# EAGLE board PDB-SL-OSD (EAGLE 6.3)
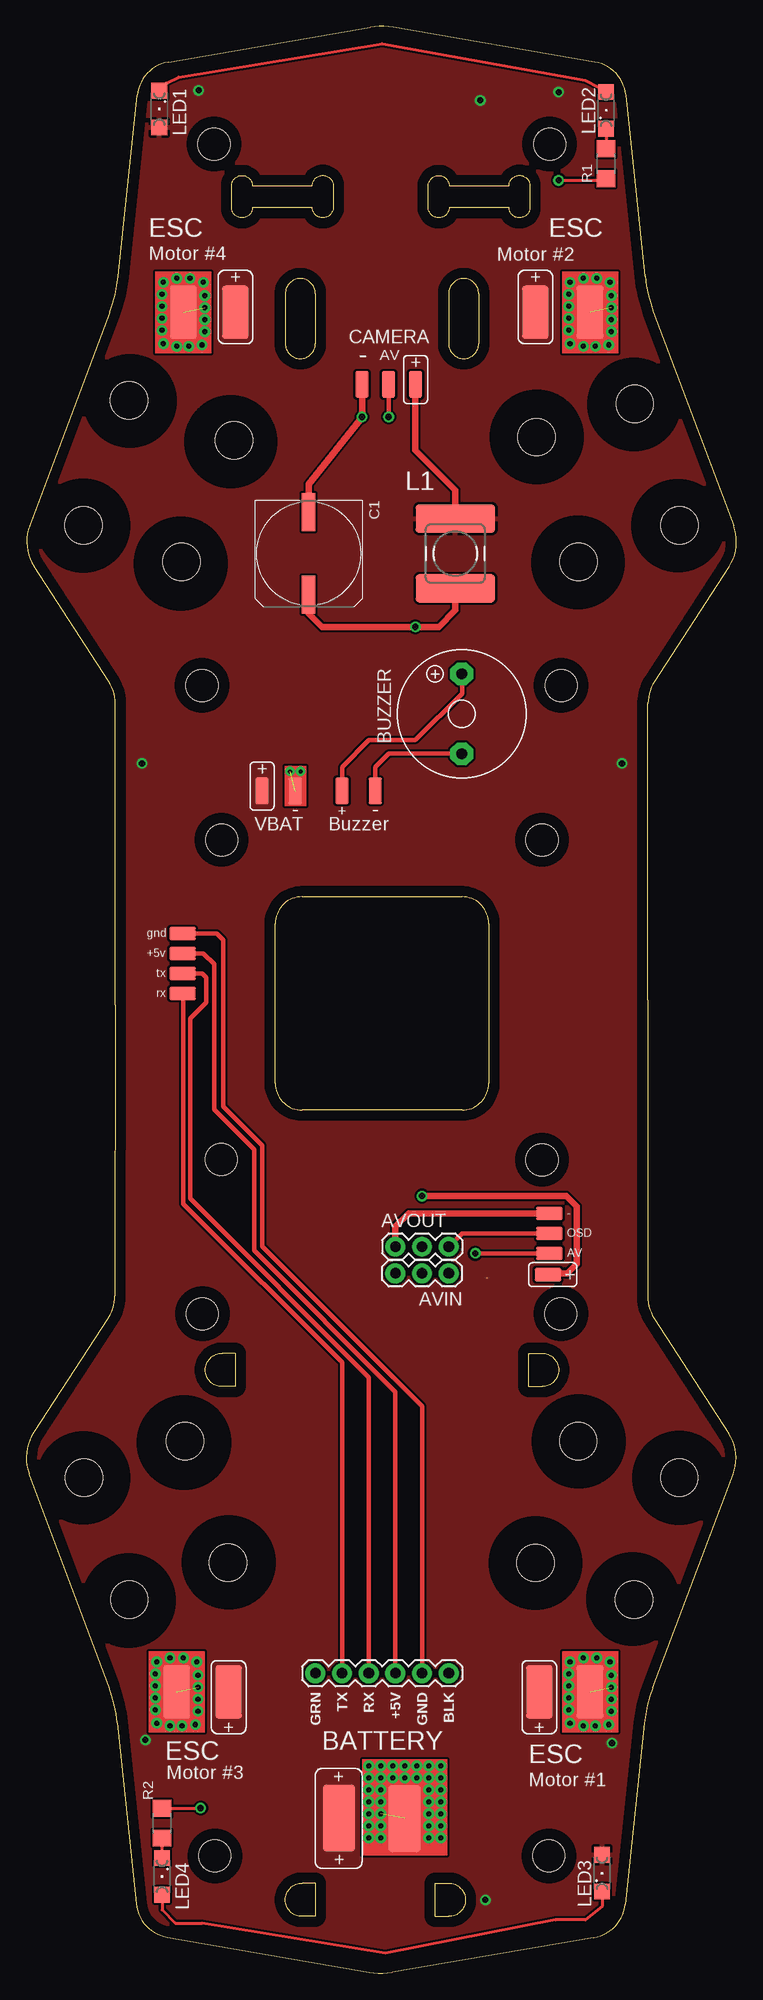
[diagram p0: board, top side]
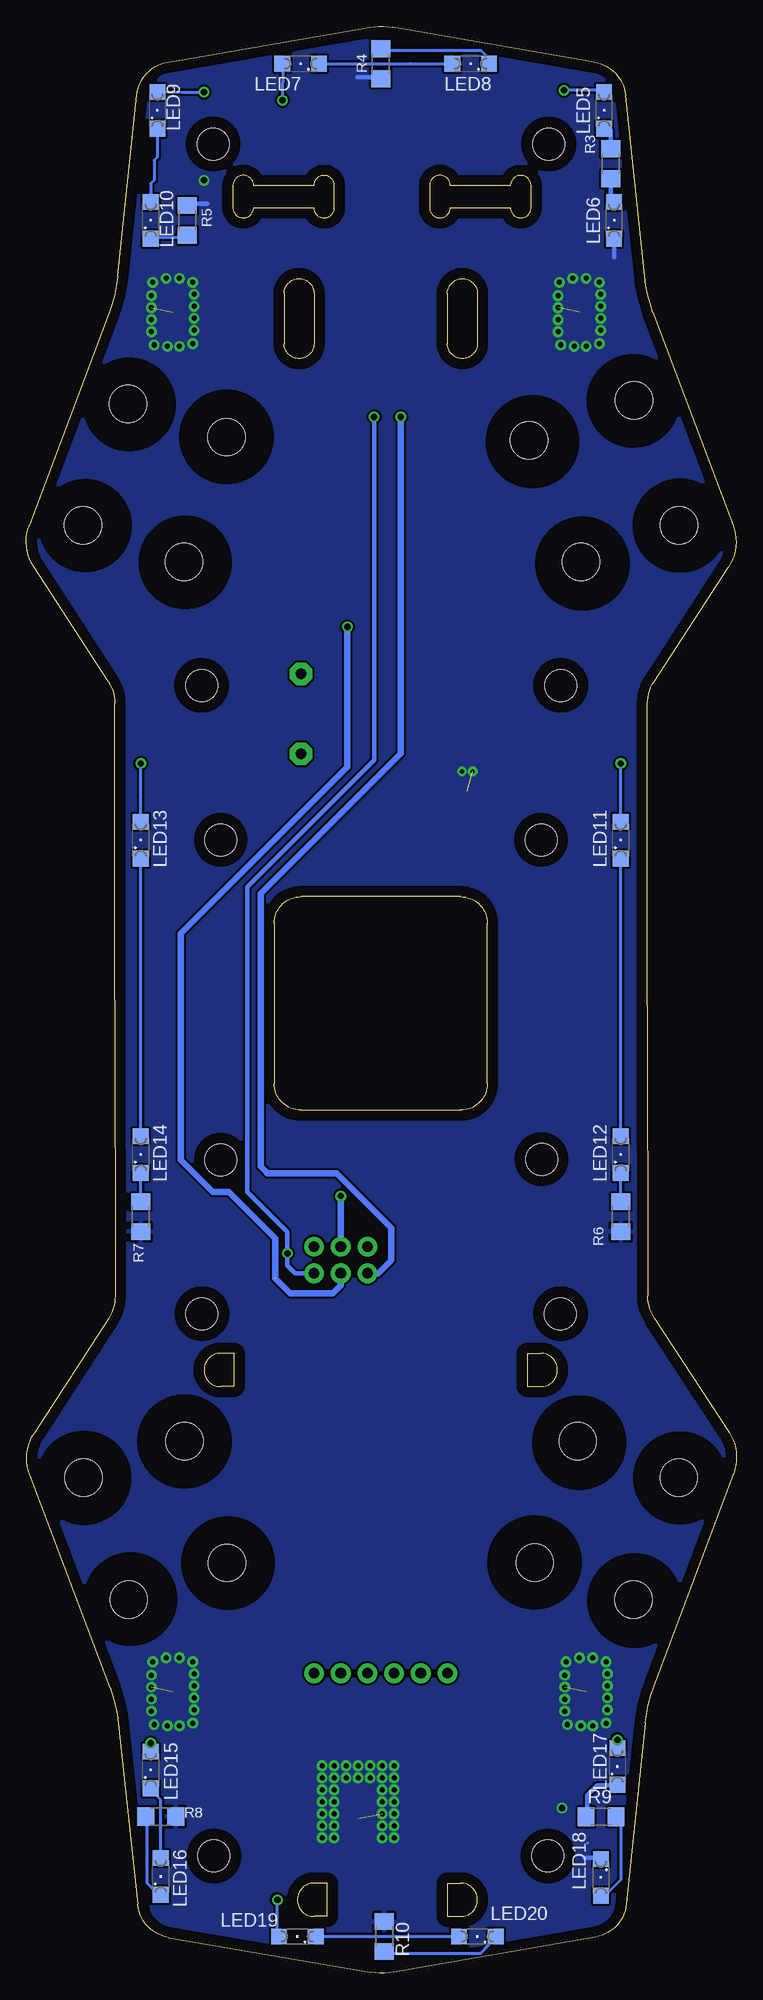
[diagram p1: board, bottom side, seen from below]

Size 67.65 x 185.5 mm. Coordinates in mm from the lower left corner, seen from the top.
Outline: 59.84,123.09 arc33 59.22,120.98 59.22,92.74 59.19,64.5 arc33 59.81,62.39 66.9,51.44 arc-54 67.33,47.52 59.67,27.2 arc15 58.87,23.8 57.04,6.55 arc-74 54.07,3.39 34.84,0.09 arc-20 32.66,0.09 13.43,3.44 arc-74 10.48,6.6 8.68,23.86 arc15 7.88,27.25 0.28,47.6 arc-54 0.71,51.51 7.82,62.45 arc33 8.45,64.55 8.48,92.27 8.48,92.77 8.48,120.98 arc33 7.85,123.09 0.75,134.03 arc-54 0.32,137.94 7.95,158.28 arc15 8.76,161.67 10.57,178.92 arc-74 13.53,182.09 32.76,185.41 arc-20 34.94,185.41 54.17,182.09 arc-74 57.13,178.92 58.94,161.67 arc15 59.74,158.28 67.37,137.94 arc-54 66.95,134.03 59.84,123.09
Outline: 26.27,102.56 41.51,102.56 arc-90 44.05,100.02 44.05,84.78 arc-90 41.51,82.24 26.27,82.24 arc-90 23.73,84.78 23.73,100.02 arc-90 26.27,102.56
Outline: 40.24,160.03 40.24,155.27 arc180 43.09,155.27 43.09,160.03 arc180 40.24,160.03
Outline: 24.68,160.03 24.68,155.27 arc180 27.54,155.27 27.54,160.03 arc180 24.68,160.03
Outline: 40.27,170.29 45.99,170.29 arc-182 47.97,170.29 47.97,168.23 arc-180 45.99,168.23 40.27,168.23 arc-180 38.29,168.23 38.29,170.29 arc-180 40.27,170.29
Outline: 21.54,170.29 27.26,170.29 arc-182 29.24,170.29 29.24,168.23 arc-180 27.26,168.23 21.54,168.23 arc-180 19.56,168.23 19.56,170.29 arc-180 21.54,170.29
Outline: 38.97,5.41 38.97,8.58 40.24,8.58 arc-180 40.24,5.41 38.97,5.41
Outline: 27.54,8.58 27.54,5.41 26.27,5.41 arc-180 26.27,8.58 27.54,8.58
Outline: 19.92,59.07 19.92,55.89 18.65,55.89 arc-180 18.65,59.07 19.92,59.07
Outline: 47.86,55.89 47.86,59.07 49.13,59.07 arc-180 49.13,55.89 47.86,55.89
Copper layers (1*16): Top 0.035mm / dielectric 1.5mm / Bottom 0.035mm
Design rules "default": minimum track width 10mil, minimum drill 24mil, track to track 8mil, track to pad 8mil, pad to pad 8mil, via to via 8mil, smd to smd 8mil, copper to edge 40mil, drill to drill 8mil, minimum pad ring 10mil, minimum via ring 8mil, stop-mask expansion 4mil, vias tented up to drill 0mil, thermal gap 10mil
Holes 3.56 mm at 15.12,50.71 5.5,47.22 48.52,39.1 57.89,35.6 62.2,47.22 52.58,50.71 52.62,134.47 62.23,137.96 48.59,146.35 57.97,149.54 9.77,149.86 19.78,146.03 14.8,134.47 5.46,137.96 9.81,35.6 19.22,39.14
Holes 3.05 mm at 16.78,62.84 18.57,77.54 49.13,77.51 50.92,62.84 18.61,107.99 49.13,107.99 50.96,122.69 49.85,174.28 17.88,174.28 16.74,122.69 17.96,11.17 49.77,11.17
tRestrict: area 10.5,46.1 to 19.5,55; area 5.3,31 to 14.2,40; area 1,42.7 to 9.9,51.6; area 48.1,46.2 to 57.1,55.2; area 44,34.6 to 52.9,43.5; area 57.7,42.7 to 66.7,51.7; area 0.9,133.4 to 9.9,142.4; area 10.2,129.8 to 19.2,138.8; area 5.4,145.4 to 14.3,154.3; area 15,141.5 to 23.9,150.4; area 53.3,31.2 to 62.2,40.1; area 48.1,130 to 57,138.9; area 44.1,141.9 to 53.1,150.9; area 53.4,145 to 62.3,153.9; area 57.6,133.5 to 66.5,142.4; area 14.8,34.6 to 23.8,43.6; area 14.2,60.2 to 19.4,65.4; area 48.3,60.2 to 53.5,65.4; area 47.3,171.7 to 52.5,176.9; area 15.3,171.7 to 20.5,176.9; area 15.4,8.6 to 20.6,13.8; area 47.2,8.6 to 52.4,13.8; area 14.1,120.1 to 19.3,125.3; area 48.4,120.1 to 53.6,125.3
bRestrict: area 10.5,46.1 to 19.5,55; area 5.2,31 to 14.2,40; area 0.9,42.7 to 9.8,51.6; area 48.1,46.2 to 57.1,55.2; area 44,34.6 to 52.9,43.5; area 57.7,42.7 to 66.6,51.7; area 0.9,133.4 to 9.9,142.4; area 10.2,129.8 to 19.1,138.8; area 5.4,145.4 to 14.3,154.3; area 15,141.5 to 23.9,150.4; area 53.3,31.2 to 62.2,40.1; area 48.1,130 to 57,138.9; area 44.1,141.9 to 53.1,150.9; area 53.4,145 to 62.3,153.9; area 57.6,133.5 to 66.5,142.4; area 14.7,34.6 to 23.7,43.6; area 14.1,120.1 to 19.3,125.3; area 48.4,120.1 to 53.6,125.3; area 48.3,60.2 to 53.5,65.4; area 14.2,60.2 to 19.4,65.4; area 15.3,171.7 to 20.5,176.9; area 47.3,171.7 to 52.5,176.9; area 15.4,8.6 to 20.6,13.8; area 47.2,8.6 to 52.4,13.8

## Footprints (pad centres in the part's own frame; a part is rotated, then mirrored left to right if it is on the bottom)
1X03 = drill 1.016 pad 1.88: 1 0,0; 2 2.54,0; 3 5.08,0
F/TMB = drill 1.016 pad 2.159 octagon: + 3.81,0; - -3.81,0
UD-10X10_NICHICON = smd 3.6 x 1.3: + 3.925,0; - -3.95,0
1X06 = drill 1.016 pad 1.88: 1 0,0; 2 2.54,0; 3 5.08,0; 4 7.62,0; 5 10.16,0; 6 12.7,0
POWER-CHOKE_WE-TPC = smd 7.57 x 2.708: 1 0,3.32; 2 0,-3.32
SML1206 = smd 1.5 x 1.5: A 1.75,0; C -1.75,0
R1206 = smd 1.6 x 1.803: 1 -1.422,0; 2 1.422,0
OC_PAD0.2X0.1VCC = smd 2.54 x 5.08: P$1 0,-0.064
OC_PAD0.2X0.1XGND = smd 2.54 x 5.08: P$1 0.127,-0.191 | drill 0.483 pad 1.016: P$2 -1.778,2.667; P$3 -1.905,1.524; P$4 -1.905,0.381; P$5 -1.905,-0.762; P$6 -1.905,-1.905; P$7 -1.778,-3.175; P$8 -0.508,-3.429; P$9 0.635,-3.429; P$10 1.905,-3.302; P$11 2.032,2.667; P$12 2.159,1.397; P$13 2.159,0.254; P$14 2.159,-0.889; P$15 2.159,-2.032; P$16 -0.508,3.048; P$17 0.762,3.048
OC_PAD0.25X0.12GND = smd 3.048 x 6.35: P$1 0.254,-0.191 | drill 0.483 pad 1.016: P$2 -2.032,3.683; P$3 -0.889,3.683; P$4 0.254,3.683; P$5 -2.032,4.826; P$6 1.397,3.683; P$7 -0.889,4.826; P$8 0.254,4.826; P$9 1.397,4.826; P$10 2.54,4.826; P$11 2.54,3.683; P$12 -2.032,2.54; P$13 -2.032,1.397; P$14 -2.032,0.254; P$15 -2.032,-0.889; P$16 -2.032,-2.032; P$17 2.54,2.54; P$18 2.54,1.397; P$19 2.54,0.254; P$20 2.54,-0.889; P$21 2.54,-2.032; P$22 -3.175,3.683; P$23 -3.175,4.826; P$24 -3.175,2.54; P$25 -3.175,1.397; P$26 -3.175,0.254; P$27 -3.175,-0.889; P$28 -3.175,-2.032; P$29 3.683,4.826; P$30 3.683,3.683; P$31 3.683,2.54; P$32 3.683,1.397; P$33 3.683,0.254; P$34 3.683,-0.889; P$35 3.683,-2.032
OC_PAD0.25X0.12VCC = smd 3.048 x 6.35: P$1 0.349,-0.286
OC_PAD0.1X0.05VCC = smd 1.27 x 2.54: P$1 0,-0.064
OC_PAD0.1X0.5GND = smd 1.27 x 2.54: P$1 0,0.064 | drill 0.406 pad 0.762: P$2 0.508,1.905; P$16 -0.508,1.905
OC_PAD_AV = smd 1.27 x 2.54: P$1 0,-0.064

## Placement (x,y rotation side)
AVIN  [1X03]  40.24,66.69 180 top
AVOUT  [1X03]  35.16,69.23 0 top
BUZZER  5V  [F/TMB]  41.48,119.99 90 top
C1  470uF/25V  [UD-10X10_NICHICON]  26.9,135.27 270 top
JP5  [1X06]  27.54,28.59 0 top
L1  100uH  [POWER-CHOKE_WE-TPC]  40.87,135.27 0 top
LED1  WHITE  [SML1206]  12.68,177.62 270 top
LED2  WHITE  [SML1206]  55.23,177.49 90 top
LED3  RED  [SML1206]  54.84,9.54 90 top
LED4  RED  [SML1206]  12.93,9.22 270 top
LED5  WHITE  [SML1206]  12.61,177.49 90 bottom
LED6  WHITE  [SML1206]  11.66,167.02 90 bottom
LED7  WHITE  [SML1206]  41.51,181.94 180 bottom
LED8  WHITE  [SML1206]  25.31,181.94 180 bottom
LED9  WHITE  [SML1206]  55.16,177.49 90 bottom
LED10  WHITE  [SML1206]  55.79,167.02 90 bottom
LED11  RED  [SML1206]  11.03,107.96 90 bottom
LED12  RED  [SML1206]  11.03,78 90 bottom
LED13  RED  [SML1206]  56.74,107.96 90 bottom
LED14  RED  [SML1206]  56.74,78 90 bottom
LED15  RED  [SML1206]  55.79,19.38 90 bottom
LED16  RED  [SML1206]  54.84,9.22 90 bottom
LED17  RED  [SML1206]  11.34,19.7 90 bottom
LED18  RED  [SML1206]  12.91,9.14 270 bottom
LED19  RED  [SML1206]  41.82,3.5 180 bottom
LED20  RED  [SML1206]  24.68,3.5 180 bottom
R1  680  [R1206]  55.22,172.41 90 top
R2  680  [R1206]  12.93,14.3 270 top
R3  680  [R1206]  11.98,172.41 270 bottom
R4  680  [R1206]  33.89,181.94 90 bottom
R5  680  [R1206]  52.3,167.02 270 bottom
R6  680  [R1206]  11.03,72.08 90 bottom
R7  680  [R1206]  56.74,72.08 90 bottom
R8  680  [R1206]  54.84,14.93 180 bottom
R9  680  [R1206]  12.91,14.89 0 bottom
R10  680  [R1206]  33.57,3.5 270 bottom
U$1  OC_PAD_VCC  [OC_PAD0.2X0.1VCC]  19.28,26.74 180 top
U$2  OC_PAD_GND  [OC_PAD0.2X0.1XGND]  14.2,27 0 top
U$3  OC_PAD_VCC  [OC_PAD0.2X0.1VCC]  48.87,26.74 180 top
U$4  OC_PAD_GND  [OC_PAD0.2X0.1XGND]  53.57,27 0 top
U$5  OC_PAD_VCC  [OC_PAD0.2X0.1VCC]  48.49,158.31 0 top
U$6  OC_PAD_GND  [OC_PAD0.2X0.1XGND]  53.57,158.44 0 top
U$7  OC_PAD_VCC  [OC_PAD0.2X0.1VCC]  19.92,158.31 0 top
U$8  OC_PAD_GND  [OC_PAD0.2X0.1XGND]  14.84,158.44 0 top
U$9  OC_PAD_GND_BIG  [OC_PAD0.25X0.12GND]  35.79,14.93 0 top
U$10  OC_PAD_VCC_BIG  [OC_PAD0.25X0.12VCC]  29.44,15.06 0 top
U$11  OC_PAD_VCC_SMALL  [OC_PAD0.1X0.05VCC]  22.46,112.73 0 top
U$12  OC_PAD_GND_SMALL  [OC_PAD0.1X0.5GND]  25.63,112.6 0 top
U$13  OC_PAD_VCC_SMALL  [OC_PAD0.1X0.05VCC]  49.76,66.56 270 top
U$15  OC_PAD_VCC_SMALL  [OC_PAD0.1X0.05VCC]  37.08,151.46 0 top
U$16  OC_PAD_AV  [OC_PAD_AV]  31.98,151.46 0 top
U$18  OC_PAD_AV  [OC_PAD_AV]  34.5,151.46 0 top
U$19  OC_PAD_AV  [OC_PAD_AV]  33.25,112.72 0 top
U$20  OC_PAD_AV  [OC_PAD_AV]  30.08,112.72 0 top
U$22  OC_PAD_AV  [OC_PAD_AV]  14.84,99.07 90 top
U$23  OC_PAD_AV  [OC_PAD_AV]  14.84,97.17 90 top
U$24  OC_PAD_AV  [OC_PAD_AV]  14.84,95.26 90 top
U$25  OC_PAD_AV  [OC_PAD_AV]  14.84,93.36 90 top
U$26  OC_PAD_AV  [OC_PAD_AV]  49.76,70.5 90 top
U$27  OC_PAD_AV  [OC_PAD_AV]  49.76,68.59 90 top
U$28  OC_PAD_AV  [OC_PAD_AV]  49.76,72.4 90 top

## Library data of the parts
AVIN AVOUT = SparkFun-Passives
BUZZER = buzzer; OC_FARNELL: unknown; OC_NEWARK: unknown
C1 L1 = rcl
JP5 = SparkFun
LED1-LED20 = led
R1-R8 R10 = resistor
R9 = ref-packages
U$1-U$13 U$15 U$16 U$18-U$20 U$22-U$28 = oc

## Nets
GND: R2.1 R6.1 R7.1 R8.1 R10.1 U$2.P$1 U$2.P$2 U$2.P$3 U$2.P$4 U$2.P$5 U$2.P$6 U$2.P$7 U$2.P$8 U$2.P$9 U$2.P$10 U$2.P$11 U$2.P$12 U$2.P$13 U$2.P$14 U$2.P$15 U$2.P$16 U$2.P$17 U$4.P$1 U$4.P$2 U$4.P$3 U$4.P$4 U$4.P$5 U$4.P$6 U$4.P$7 U$4.P$8 U$4.P$9 U$4.P$10 U$4.P$11 U$4.P$12 U$4.P$13 U$4.P$14 U$4.P$15 U$4.P$16 U$4.P$17 U$6.P$1 U$6.P$2 U$6.P$3 U$6.P$4 U$6.P$5 U$6.P$6 U$6.P$7 U$6.P$8 U$6.P$9 U$6.P$10 U$6.P$11 U$6.P$12 U$6.P$13 U$6.P$14 U$6.P$15 U$6.P$16 U$6.P$17 U$8.P$1 U$8.P$2 U$8.P$3 U$8.P$4 U$8.P$5 U$8.P$6 U$8.P$7 U$8.P$8 U$8.P$9 U$8.P$10 U$8.P$11 U$8.P$12 U$8.P$13 U$8.P$14 U$8.P$15 U$8.P$16 U$8.P$17 U$9.P$1 U$9.P$2 U$9.P$3 U$9.P$4 U$9.P$5 U$9.P$6 U$9.P$7 U$9.P$8 U$9.P$9 U$9.P$10 U$9.P$11 U$9.P$12 U$9.P$13 U$9.P$14 U$9.P$15 U$9.P$16 U$9.P$17 U$9.P$18 U$9.P$19 U$9.P$20 U$9.P$21 U$9.P$22 U$9.P$23 U$9.P$24 U$9.P$25 U$9.P$26 U$9.P$27 U$9.P$28 U$9.P$29 U$9.P$30 U$9.P$31 U$9.P$32 U$9.P$33 U$9.P$34 U$9.P$35 U$12.P$1 U$12.P$2 U$12.P$16
N$9: R3.2
N$10: LED8.A
N$13: LED9.C LED10.A
N$16: LED1.C LED2.A
N$17: LED2.C R1.2
N$18: LED3.C
N$19: LED4.C R2.2
N$27: LED16.C R8.2
S$1: JP5.4
S$4: LED14.C
S$7: JP5.3
S$9: U$13.P$1
S$11: U$19.P$1
S$15: LED6.A
S$22: JP5.5
S$23: LED6.C
S$25: AVIN.1
S$26: AVIN.3
S$27: AVOUT.3
S$32: LED7.C
S$37: AVOUT.1
S$39: LED16.A
S$40: LED4.A
S$42: JP5.2
S$43: AVOUT.2
S$45: AVIN.2
VCC: L1.1 LED1.A LED3.A LED5.A LED7.A LED9.A LED11.A LED13.A LED15.A LED17.A LED19.A U$1.P$1 U$3.P$1 U$5.P$1 U$7.P$1 U$10.P$1 U$11.P$1

## Tracks (layer width: path | path; a pad name or v marks a point on that pad's centre or on a via)
GND  (via drill 0.6)  (6 unrouted)
  Top 0.305: R2.1 v16.61,15.74 | v50.71,170.83 55.16,170.83
  Bottom 0.305: 14.21,12.39 14.2,12.39 14.21,12.41
  Bottom 0.406: 52.3,168.6 50.4,168.6 | 33.89,180.67 36.11,180.67 | 11.66,165.11 11.66,163.52 | 12.97,10.93 13.03,10.99 14.45,10.99
  pour Bottom: -2.94,188.29 70.72,188.29 70.72,187.02 69.45,187.02 69.45,-1.58 -2.94,-1.58
N$9
  Bottom 0.305: R3.2 11.98,170.51
N$10
  Bottom 0.305: 31.03,181.94 LED8.A
N$11  (via drill 0.61)
  Top 0.406: 34.52,151.46 v34.52,148.28
N$13
  Bottom 0.305: LED9.C 55.16,173.05 55.48,172.73 55.48,170.83 55.79,170.51 LED10.A
N$16
  Top 0.305: LED1.C 13.31,180.1 14.52,180.67 33.89,183.84 53.25,180.35 54.52,179.72 LED2.A
N$17
  Top 0.305: LED2.C R1.2
N$18
  Top 0.305: LED3.C 54.84,6.36 53.25,5.09 50.4,5.09 34.2,1.92 16.74,4.77 14.2,4.77 12.93,6.04 12.93,7
N$19
  Top 0.305: LED4.C R2.2
N$27
  Bottom 0.305: LED16.C 55.7,8.17 56.11,8.58 56.11,14.61 R8.2
S$1
  Top 0.406: JP5.4 35.16,55.38 21.69,68.84 21.69,78.5 17.88,82.31 17.88,96.15 16.87,97.17 14.84,97.17
S$2
  Bottom 0.305: 11.03,73.35 11.03,76.53
S$3
  Bottom 0.305: 11.03,79.7 11.03,106.69
S$4
  Bottom 0.305: LED14.C 56.63,76.85
S$5
  Bottom 0.305: 56.75,79.63 56.75,106.69
S$6
  Bottom 0.305: 56.75,73.67 56.75,76.23
S$7
  Top 0.406: 14.84,95.26 16.74,95.26 17.12,94.88 17.12,92.47 15.6,90.94 15.6,87.13 15.6,87.01 15.6,73.8 32.62,56.78 JP5.3
S$8
  Bottom 0.305: 55.48,165.43 52.3,165.43
  Bottom 0.406: 55.79,165.11 55.48,165.43
S$10
  Top 0.61: 37.06,151.46 37.06,145.11 40.87,141.3 40.87,138.44 40.55,138.76
S$11
  Top 0.406: U$19.P$1 33.25,113.04
S$12  (via drill 0.61)
  Top 0.61: 31.98,151.46 v31.98,148.28 26.9,141.87 26.9,139.08
S$15
  Bottom 0.305: LED6.A 11.98,168.38 11.98,168.92 11.98,169.24
  Bottom 0.406: 11.98,171.14 11.98,168.92
S$19
  Top 0.406: 30.08,112.41 30.08,114.95 32.62,117.49 37.06,117.49 41.51,121.93 41.51,123.84
S$22
  Top 0.406: JP5.5 37.7,53.99 22.46,69.23 22.46,78.88 18.77,82.56 18.77,98.44 18.14,99.07 14.84,99.07
S$23
  Bottom 0.305: LED6.C 11.44,165.75 11.03,165.75
S$24
  Top 0.406: 41.51,116.22 34.52,116.22 33.25,114.95 33.25,112.41
S$25  (via drill 0.6)
  Top 0.406: v42.78,68.59 49.76,68.59
  Bottom 0.406: 34.52,147.97 34.52,115.58 46.59,103.52 46.59,74.43 42.78,70.62 v42.78,68.59 42.78,67.45 42.01,66.69 AVIN.1
S$26
  Bottom 0.61: AVIN.3 34.14,66.69 33,67.83
S$27
  Top 0.406: 49.76,70.5 41.51,70.5 AVOUT.3
S$28
  Bottom 0.406: 12.61,175.59 11.98,175.59 11.98,173.68
S$30
  Bottom 0.406: 11.31,17.95 11.37,17.89 13.29,17.89 14.23,16.95 14.23,14.91
S$31
  Bottom 0.305: 34.2,183.21 24.36,183.21 23.41,182.26
S$32
  Bottom 0.305: LED7.C 31.03,181.94
S$33
  Bottom 0.61: 31.98,147.97 31.98,116.22 45.32,102.88 45.32,76.97
S$35
  Bottom 0.305: 11.03,14.62 11.03,8.9 12.61,7.31
S$36
  Bottom 0.305: 22.77,3.5 23.73,2.55 24.04,2.23 24.36,1.92 33.57,1.92
S$37
  Top 0.61: 49.76,72.4 36.43,72.4 35.16,71.13 AVOUT.1
S$38
  Bottom 0.305: 39.92,3.5 26.58,3.5
S$39
  Bottom 0.305: LED16.A 54.84,16.52 55.79,17.47
S$40
  Top 0.305: 13.57,7.83 LED4.A
S$41
  Bottom 0.61: 32.87,67.96 32.87,71 38.08,76.21 44.68,76.21
S$42
  Top 0.406: JP5.2 30.08,58.18 14.96,73.29 14.96,93.36
S$43  (via drill 0.6)
  Top 0.61: v37.7,74.05 51.41,74.05 52.43,73.04 52.43,67.57 51.54,66.69 49.63,66.69
  Bottom 0.61: AVOUT.2 v37.7,74.05
S$44
  Bottom 0.61: 45.32,76.85 44.81,76.34
S$45  (via drill 0.6)  (1 unrouted)
  Top 0.61: 26.9,131.77 26.9,129.55 28.17,128.28 v37.06,128.28 39.28,128.28 40.87,129.87 40.87,132.41
  Bottom 0.61: AVIN.2 37.7,65.54 38.46,64.78 42.52,64.78 43.92,66.18 | v37.06,128.28 37.06,114.95 52.94,99.07 52.94,77.48 49.89,74.43 48.36,74.43 43.92,69.99 43.92,66.3
VCC  (via drill 0.6)
  Bottom 0.305: LED5.A 12.61,179.4 v16.42,179.4 | LED7.A 43.21,181.74 v43.25,178.45 | LED9.A 52.82,179.2 v50.71,179.22 | LED11.A v11.03,115.26 | LED13.A 56.74,112.12 v56.74,115.26 | LED15.A v55.79,21.92 | LED17.A v11.34,22.24 | LED19.A 43.73,3.71 v43.73,7
  pour Top: -2.94,187.65 70.72,187.65 69.45,-1.58 -1.67,-1.58

## Text on the board
tPlace: GRN | TX | RX | +5V | GND | BLK
tNames: ESC | ESC | Motor #4 | Motor #2 | CAMERA | - | AV | - | VBAT | + | - | Buzzer | gnd | +5v | tx | rx | - | OSD | AV | BATTERY | ESC | ESC | Motor #3 | Motor #1